# Altium PCB PCB.PcbDoc
Units mil, origin at the board's own origin, x right, y up, seen from the top; angles counter-clockwise.
Board outline 797.43 x 797.43 mil, 4 copper layers (Component Side, Power, Ground Plane, Solder Side), stack 42.047 mil thick; 42 components, 47 nets, 224 pads, 111 vias.
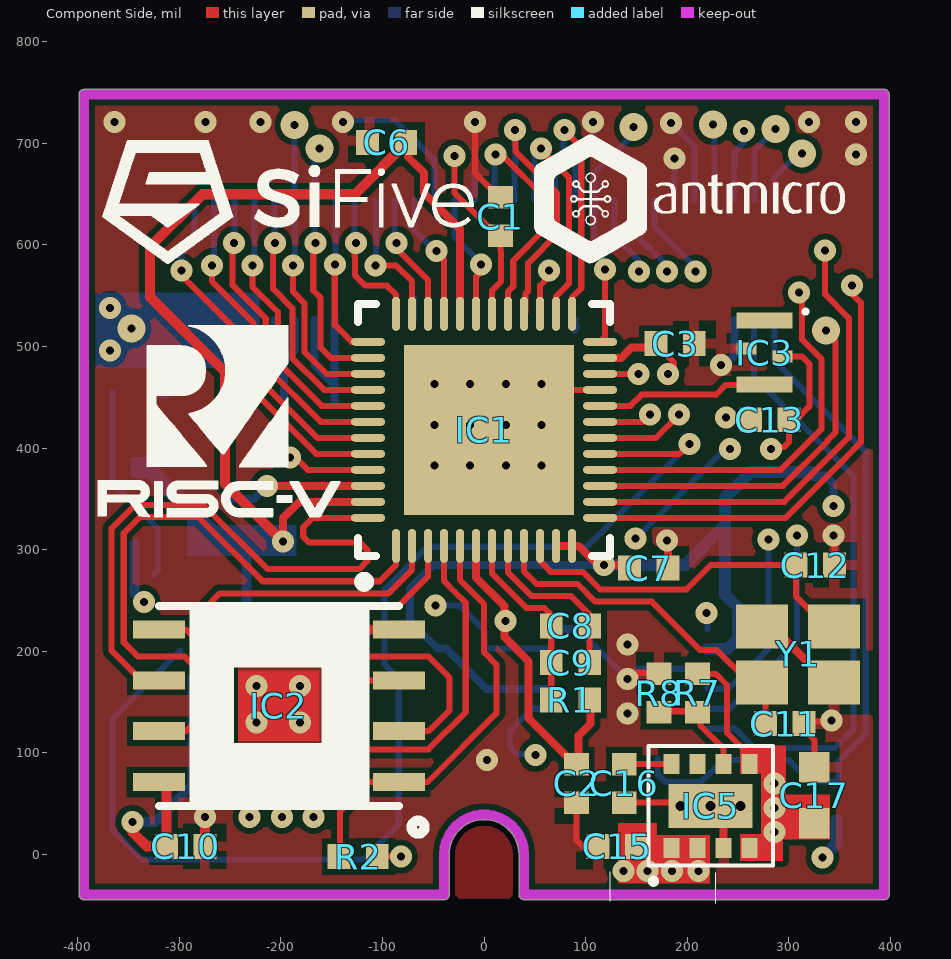
[diagram p0: Component Side view]
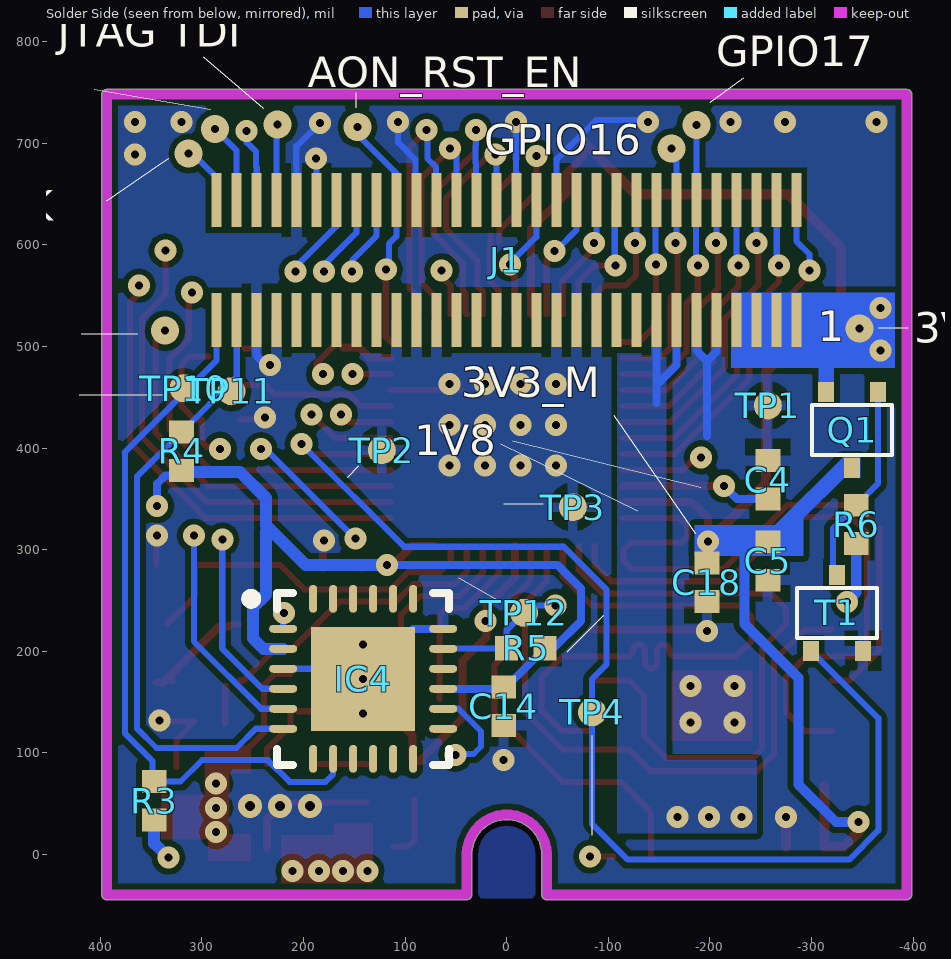
[diagram p1: Solder Side view, seen from below]
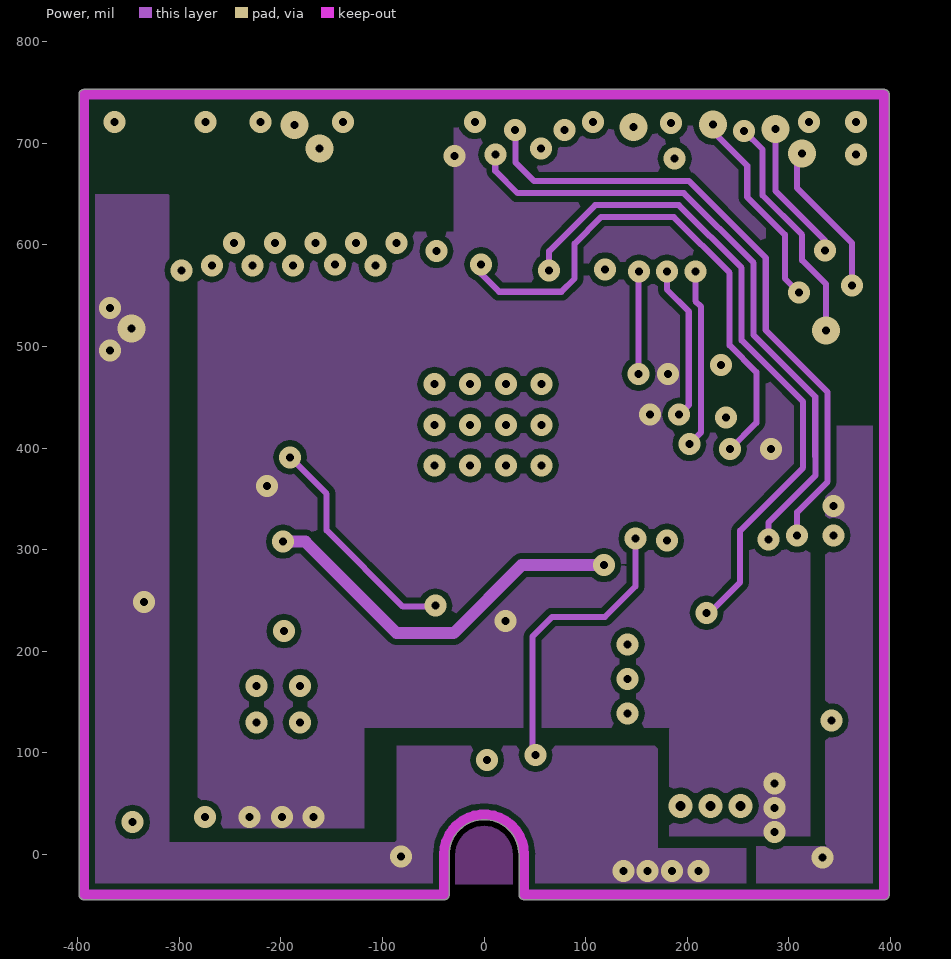
[diagram p2: Power]
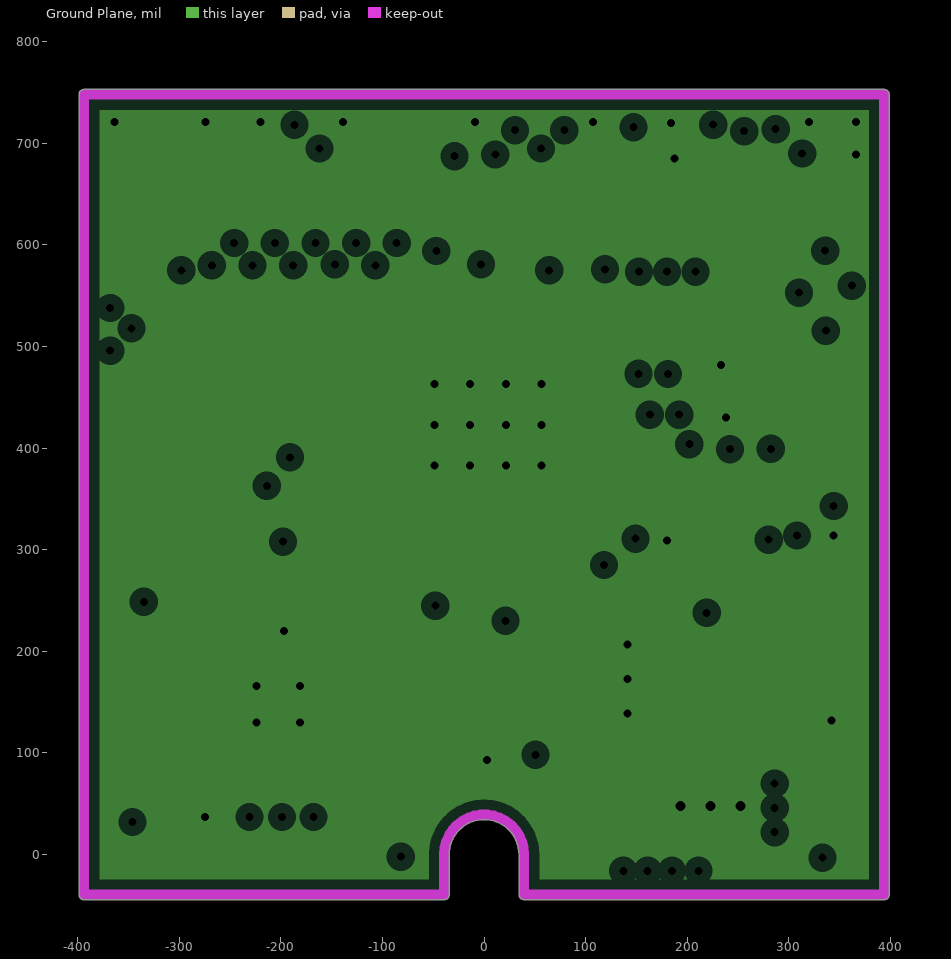
[diagram p3: Ground Plane, clearances drawn from the general rule]

## Layer stack, top to bottom
Top Solder: solder mask 0.4, Solder Resist, Dk 3.5
Component Side: signal copper 1.4173
Dielectric 1: core 11.811, FR-4, Dk 4.8
Power: signal copper 0.7087
Dielectric 4: core 14.1732, Dk 4.2
Ground Plane: plane copper 0.7087, net GND
Dielectric 3: core 11.811, Dk 4.2
Solder Side: signal copper 1.4173
Bottom Solder: solder mask 0.4, Solder Resist, Dk 3.5

## Board outline
-393.7,-44.39 cw(c-393.7,-39.37) -398.72,-39.37 -398.72,748.03 cw(c-393.7,748.03) -393.7,753.05 393.7,753.05 cw(c393.7,748.03) 398.72,748.03 398.72,-39.37 cw(c393.7,-39.37) 393.7,-44.39 40,-44.39 cw(c40,-39.37) 39.68,-44.38 39.69,-44.38 cw(c39.37,-39.37) 34.36,-39.37 34.36,0 ccw(c0,0) -34.36,0.07 cw(c-39.37,0) -34.35,0 -34.35,-39.37 cw(c-39.37,-39.37) -39.44,-44.39

## Design rules (kind name [scope] priority, off if disabled: settings)
Clearance [All] p1: gap=5.91
DiffPairsRouting [All] p1: maxlimit=8 minlimit=7.99 mostfreqgap=8 toplayer_maxgap=7.99 toplayer_prefgap=7.99 toplayer_minwidth=5.91 toplayer_maxwidth=11.81 toplayer_prefwidth=7.87 midlayer1_mingap=8 midlayer1_minwidth=5.91 midlayer1_maxwidth=11.81 midlayer1_prefwidth=7.87 bottomlayer_maxgap=7.99 bottomlayer_prefgap=7.99 bottomlayer_minwidth=5.91 bottomlayer_maxwidth=11.81 bottomlayer_prefwidth=7.87 maxuncoupledlength=500
HoleSize [All] p1: absolutevalues=TRUE maxlimit=150 minlimit=7.87 maxpercent=80.000 minpercent=20.000
MinimumAnnularRing [All] p1: minimumring=4.92
MinimumSolderMaskSliver [All] p1: minsoldermaskwidth=0
PlaneClearance [All] p1: clearance=10
PlaneConnect [All] p1: planeconnectstyle=Direct reliefexpansion=20 reliefentries=4 reliefconductorwidth=10 reliefairgap=10
PolygonConnect PolygonConnect_via [IsVia] p1: connectstyle=Direct reliefconductorwidth=10 reliefentries=4 polygonreliefangle="90 Angle" airgapwidth=10
PolygonConnect [All] p2: connectstyle=Relief reliefconductorwidth=10 reliefentries=4 polygonreliefangle="90 Angle" airgapwidth=10
RoutingVias [All] p1: holewidth=7.87 width=21.65 viastyle="Through Hole" minholewidth=7.87 minwidth=21.65 maxholewidth=7.87 maxwidth=27.56
SilkToSilkClearance [All] p1: silktosilkclearance=8
SilkToSolderMaskClearance [IsPad] p1: minsilkscreentomaskgap=3 clearancetoexposedcopper=TRUE
SolderMaskExpansion [All] p1: expansion=4
Width [All] p1: maxlimit=78.74 minlimit=5.91 preferedwidth=8
22 further rules are at their usual default settings.

## Components (designator, comment, footprint, x,y, rotation, side; value= is the part's Value field where it differs from the comment)
C1 "100n" 0402 16,628 r270 top
C2 "100n" 0402 91,70 r90 top
C3 "10u" 0402 188,503 r180 top
C4 "10u" 0402 -257,369 r270 bottom
C5 "100n" 0402 -257,289 r90 bottom
C6 "100n" 0402 -96,701 r0 top
C7 "100n" 0402 162,282 r180 top
C8 "100n" 0402 85,225 r180 top
C9 "100n" 0402 85,189 r180 top
C10 "100n" 0402 -293.7,8.03 r180 top
C11 "12p" 0402 296,129 r180 top
C12 "12p" 0402 326,285 r180 top
C13 "10u" 0402 281.3,428.03 r0 top
C14 "100n" 0402 3,146 r90 bottom
C15 "10u" 0402 131,8 r0 top
C16 "3n3" 0402 138,70 r90 top
C17 "22u" 0603 325,86 r270 top
C18 "10u" 0402 -197,268 r90 bottom
IC1 "FE310-G000" FE310-G000 0,418.03 r90 top
IC2 "IS25LP128" WSON_6x5mm_8pin -84,48 r90 top
IC3 "SIT1533AC-H5-D14-32.768D" SIT1533AC 276,494 r270 top
IC4 "SC18IS600" QFN-24_4X4MM 141.3,173.03 r180 bottom
IC5 "TPS82130SILT" MicroSIP 223,48 r90 top
J1 "AXK6F60347YG" AXK6F60347YG 0.3,585.03 r180 bottom locked
Q1 "NTS4173PT1G" SC70-3 -340,418 r270 bottom
R1 "100R" 0402 85,152 r180 top
R2 "100k" 0402 -124,-2 r180 top
R3 "1k" 0402 347,53 r90 bottom
R4 "1k" 0402 320,397 r90 bottom
R5 "1k" 0402 -18.7,203.03 r0 bottom
R6 "100k" 0402 -344,325 r90 bottom
R7 "124k" 0402 210,159 r270 top
R8 "100k" 0402 172,159 r90 top
T1 "DMN2004WK-7" SC70-3 -325,238 r90 bottom
TP1 "Testpad" TP-R-0.7 -257,442 r90 bottom
TP2 "Testpad" TP-R-0.7 123,398 r90 bottom
TP3 "Testpad" TP-R-0.7 -65,342 r90 bottom
TP4 "Testpad" TP-R-0.7 -84,140 r180 bottom
TP10 "Testpad" TP-R-0.7 318,459 r90 bottom
TP11 "Testpad" TP-R-0.7 271,456 r90 bottom
TP12 "Testpad" TP-R-0.7 -17,238 r90 bottom
Y1 "X22-16.000-12-30/30/-40+85" CRYSTAL_X22_2.5x2mm 309,197 r180 top

## Footprints (in the part's own frame and the unit in brackets; to place one, negate y for a bottom-side part, rotate by r counter-clockwise, add the part's x,y. Pads: shape width x height; smd on the part's side, far side on the other; paste and mask are expansions set on the pad)
0402 [mm]
  rect 0.57x0.62 smd: 1(-0.48,0) 2(0.48,0)
  body extent -0.55,-0.3 0.55,0.3, height 0.5
0603 [mil]
  rect 30x30 smd: 1(0,0) 2(55,0)
  body extent -2,-15 58,15, height 31
AXK6F60347YG [mm]
  rect 0.25x1.35 smd: 1(7.25,-1.501) 2(7.25,1.501) 3(6.75,-1.501) 4(6.75,1.501) 5(6.25,-1.501) 6(6.25,1.501) 7(5.75,-1.501) 8(5.75,1.501) 9(5.25,-1.501) 10(5.25,1.501) 11(4.75,-1.501) 12(4.75,1.501) 13(4.25,-1.501) 14(4.25,1.501) 15(3.75,-1.501) 16(3.75,1.501) 17(3.25,-1.501) 18(3.25,1.501) 19(2.75,-1.501) 20(2.75,1.501) 21(2.25,-1.501) 22(2.25,1.501) 23(1.75,-1.501) 24(1.75,1.501) 25(1.25,-1.501) 26(1.25,1.501) 27(0.75,-1.501) 28(0.75,1.501) 29(0.25,-1.501) 30(0.25,1.501) 31(-0.25,-1.501) 32(-0.25,1.501) 33(-0.75,-1.501) 34(-0.75,1.501) 35(-1.25,-1.501) 36(-1.25,1.501) 37(-1.75,-1.501) 38(-1.75,1.501) 39(-2.25,-1.501) 40(-2.25,1.501) 41(-2.75,-1.501) 42(-2.75,1.501) 43(-3.25,-1.501) 44(-3.25,1.501) 45(-3.75,-1.501) 46(-3.75,1.501) 47(-4.25,-1.501) 48(-4.25,1.501) 49(-4.75,-1.501) 50(-4.75,1.501) 51(-5.25,-1.501) 52(-5.25,1.501) 53(-5.75,-1.501) 54(-5.75,1.501) 55(-6.25,-1.501) 56(-6.25,1.501) 57(-6.75,-1.501) 58(-6.75,1.501) 59(-7.25,-1.501) 60(-7.25,1.501)
  body extent -8.99,-1.62 9.01,1.68, height 1.25
CRYSTAL_X22_2.5x2mm [mm]
  rect 1.3x1.1 smd: 1(0.9,0.7) 3(-0.9,-0.7) GND(-0.9,0.7) GND(0.9,-0.7)
  body extent -1.25,-1 1.25,1, height 0.8
FE310-G000 [mm]
  oval 0.85x0.2 smd paste+0 mask+0.05: 1(-2.9,2.2)
  oval 0.85x0.2 smd mask+0.05: 2(-2.9,1.8) 3(-2.9,1.4) 4(-2.9,1) 5(-2.9,0.6) 7(-2.9,-0.2) 8(-2.9,-0.6) 9(-2.9,-1) 10(-2.9,-1.4) 12(-2.9,-2.2) 25(2.9,-2.2) 26(2.9,-1.8) 27(2.9,-1.4) 28(2.9,-1) 29(2.9,-0.6) 31(2.9,0.2) 33(2.9,1) 34(2.9,1.4) 35(2.9,1.8) 36(2.9,2.2) IVDD(-2.9,-1.8) IVDD(2.9,0.6) VDD(-2.9,0.2) VDD(2.9,-0.2)
  oval 0.2x0.85 smd mask+0.05: 13(-2.2,-2.9) 14(-1.8,-2.9) 15(-1.4,-2.9) 16(-1,-2.9) 17(-0.6,-2.9) 18(-0.2,-2.9) 19(0.2,-2.9) 20(0.6,-2.9) 21(1,-2.9) 22(1.4,-2.9) 23(1.8,-2.9) 24(2.2,-2.9) 37(2.2,2.9) 38(1.8,2.9) 39(1.4,2.9) 40(1,2.9) 41(0.6,2.9) 42(0.2,2.9) 43(-0.2,2.9) 44(-0.6,2.9) 45(-1,2.9) 48(-2.2,2.9) IVDD(-1.8,2.9) VDD(-1.4,2.9)
  rect 4.25x4.25 smd mask+0.05: 49(0,-0.127)
  silkscreen extent -3.92,-3.15 3.15,3.15, body extent -3.01,-3.03 3.03,3.01, height 0.85
MicroSIP [mm]
  rect 0.5x0.4 smd: 1(-1.05,0.975) 2(-1.05,0.325) 3(-1.05,-0.325) 4(-1.05,-0.975) 5(1.05,-0.975) 6(1.05,-0.325) 7(1.05,0.325) 8(1.05,0.975)
  rect 1.1x2.1 smd: 9(0,0)
  silkscreen extent -1.95,-1.56 1.5,1.56, body extent -1.4,-1.5 1.4,1.5, height 1.54
QFN-24_4X4MM [mm]
  oval 0.7x0.2 smd: 1(-2,1.25) 2(-2,0.75) 3(-2,0.25) 4(-2,-0.25) 5(-2,-0.75) 6(-2,-1.25) 13(2,-1.25) 14(2,-0.75) 15(2,-0.25) 16(2,0.25) 17(2,0.75) 18(2,1.25)
  oval 0.2x0.7 smd: 7(-1.25,-2) 8(-0.75,-2) 9(-0.25,-2) 10(0.25,-2) 11(0.75,-2) 12(1.25,-2) 19(1.25,2) 20(0.75,2) 21(0.25,2) 22(-0.25,2) 23(-0.75,2) 24(-1.25,2)
  rect 2.6x2.6 smd: 25(0,0)
  silkscreen extent -2.93,-2.15 2.15,2.15, body extent -2,-2 2,2, height 0.9
SC70-3 [mm] "SC70, 3-Leads, Pitch 0,65mm, EIAJ SC-88a"
  rect 0.5x0.4 smd: 1(-0.95,0.65) 2(-0.95,-0.65) 3(0.95,0)
  silkscreen extent -0.63,-1 0.63,1, body extent -1.15,-1.08 1.15,1.02, height 1
SIT1533AC [mm]
  rect 0.4x1.4 smd: 1(-0.8,0) 3(0.8,0)
  rect 0.3x0.5 smd: 2(-0.1,-0.45) 4(0.1,0.45)
  silkscreen extent -1.07,0.98 -0.98,1.07, body extent -1,-0.6 1,0.6, height 0.55
TP-R-0.7 [mm]
  round 0.7 smd: 1(0,0)
WSON_6x5mm_8pin [mm] "WSON 6x5mm 8 pins"
  rect 0.45x1.3 smd: 1(0.595,0) 2(1.865,0) 3(3.135,0) 4(4.405,0) 5(4.405,6) 6(3.135,6) 7(1.865,6) 8(0.595,6)
  silkscreen extent 0,0 5,6, body extent -0.04,0.03 4.96,6.03, height 0.78

## Part data
C1 C2 C5 C6 C7 C8 C9 C10 C14: library part C_100n_0402, "MLCC SMT Capacitor 100nF 0402"
C3 C4 C13 C15 C18: library part C_10u_0402, "MLCC SMT Capacitor 10uF 0402"
C11 C12: library part C_12p_0402, "MLCC SMT Capacitor 12pF 0402"
C16: library part C_3n3_0402, "MLCC SMT Capacitor 3.3nF 0402"
C17: library part C_22_0603, "MLCC SMT Capacitor 22uF 0603"
IC2: "Flash Memory 128Mb QPI/QSPI, WSON, RoHS, ET"
IC3: library part SIT1533AC, "32.768kHz LVCMOS MEMS (Silicon) Oscillator Surface Mount 1.2 V ~ 3.63 V 1.3µA"
IC4: "IC SPI TO I2C BUS 24-HVQFN"
IC5: library part TPS82130, "3-A 17V STEP-DOWN CONVERTER"
J1: "CONN HEADER BRD/BRD .5MM 60POS"
Q1: library part PMOS, "MOSFET P-CH 30V 1.2A SC70-3"
R1: library part R_100R_0402, "SMT Resistor 100R 0402"
R2 R6 R8: library part R_100k_0402, "SMT Resistor 100k 0402"
R3 R4 R5: library part R_1k_0402, "SMT Resistor 0402"
R7: library part R_124k_0402, "SMT Resistor 124k 0402"
T1: library part NMOS, "MOSFET N-CH 20V 540MA SC70-3"
TP1 TP2 TP3 TP4 TP10 TP11 TP12: "Testpad 1.5mm diameter"
Y1: library part CRYSTAL_4PIN, "MERCURY UNITED ELECTRONICS  X22-16.000-12-30/30/-40+85  Crystal, 16 MHz, SMD, 2.5mm x 2mm, 30 ppm, 12 pF, 30 ppm, X22 Series"

## Via types
v1: diameter 21.65, hole 7.87, Component Side to Solder Side, tented both sides, 94 vias
v2: diameter 27.56, hole 7.87, Component Side to Solder Side, tented top, 8 vias
v3: diameter 21.65, hole 7.87, Component Side to Solder Side, tented bottom, 4 vias
v4: diameter 23.62, hole 9.84, Component Side to Solder Side, tented bottom, 3 vias
v5: diameter 21.65, hole 7.87, Component Side to Solder Side, tented top, 2 vias

## Nets (pads, with @x,y where several pads share a name; then routed paths per layer and width w, separated by ;. In a path a pad name is that pad's centre, name@x,y a point inside that pad or via, vN(x,y) a via of type N, cw(c..) or ccw(c..) an arc to the next point about the centre after c; other vN are vias at no path point)
1V8: C1.2 C2.2 C3.2 C4.2 C13.2 C17.2 IC1.19 IC1.23 IC1.VDD IC3.4 IC5.4 IC5.5 J1.13 J1.15 R1.1 R7.1 | length 1216.2
  Component Side w5.94: R7.1@213,177.9 228.1,177.9 239.1,166.9 239.1,119.9 261.39,97.61 IC5.5
  Component Side w5.98: v1(-29.19,687.43) -29.19,651.19 4.9,617.1 7,617.1 C1.2@7,603 ; IC1.VDD@7.87,532.2 7.87,555.32 16.78,564.22 16.78,593.22 16,594 C1.2 ; IC1.19 156,425.91 v1(163.13,433.03) ; C3.2 169.1,501.9 187,484 187,473 v1(181,473) ; v1(282.22,399.37) 282.22,401.22 295.22,401.22 300.2,406.2 C13.2 307.03,428.03 320.09,441.09 320.09,483 313.03,490.06 IC3.4
  Component Side w7.87: v5(-213.91,362.91) IC1.VDD@-114.17,362.91 ; IC1.VDD@-7.87,303.86 -7.87,272.54 20,244.67 v1@20,225 ; v1@23,228 v1@20,225 ; C2.2@83.36,91.9 C2.2@86.1,91.9 ; R1.1@104.9,152 104.9,128.9 93,117 93,93.9 91,91.9 C2.2@86.1,91.9 ; IC1.23 134.9,488.9 145.13,499.13 C3.2@161.3,499.13 ; v1@20,225 20,214 43.74,190.26 43.74,134.26 65.1,112.9 C2.2@86.1,91.9
  Power w5.98: v1@282.22,399.22 v1(282.22,399.37)
  Solder Side w7.87: C4.2 -226.72,350.1 v5(-213.91,362.91) ; J1.13 -167.02,481.68 -147.34,462 ; -147.34,444.66 -147.34,462 ; J1.15 -147.34,462
  other v1: 286,22 -231,37 -199,37 -168,37 286,46 286,70 21,230
3V3: C15.2 IC5.1 IC5.2 J1.1 J1.3 J1.5 J1.7 Q1.2 R2.1 R6.1 | length 115.9
  Component Side w5.98: R2.1 v1(-82,-2)
  Component Side w10: v1(-334.98,248.83) -334,249.81 v1@-334,252
  Solder Side w10: R6.1 -344,257.84 v1(-334.98,248.83)
  Solder Side w14.96: Q1.2 -314.41,483.59
  other v1: 137,-16 161,-16 185,-16 211,-16 -368,496 -368,538
  other v2: -347,518
3V3_M: C5.2 C6.2 C7.2 C10.2 C14.2 C18.2 IC1.12 IC1.IVDD IC2.8 IC4.2 IC4.15 Q1.3 R3.1 R4.1 R5.1 | length 2778.5
  Component Side w7.87: v5(-198,308) -198,331.17 -182,347.17 IC1.IVDD@-114.17,347.17 ; C6.2@-75.1,701.95 -75.1,686.86 -59,670.76 -59,651 -23.67,615.67 -23.67,532.25 IC1.IVDD@-23.62,532.2 ; IC1.IVDD@70.87,303.86 IC1.12 93.14,303.86 v1@115,282 ; v1(118,285) 140.1,285 C7.2
  Component Side w10: v1(-346,32) -346,22.03 -332,8.03 C10.2 IC2.8@-312.6,67.88 ; v5(-198,308) -255,365 -255,475 -329,549 -329,598 -277,650 -127.05,650 -75.1,701.95 C6.2@-75.1,703
  Component Side w11.81: v1(344,343) v1@347.29,343
  Power w11.81: v5(-198,308) -176,308 -86,218 -30,218 37,285 v1(118,285)
  Solder Side w7.87: IC4.15 2.24,163.19 R5.1 -46.03,203.03 -73,230 -73,262 -50,285 v1(118,285) ; 237,318 237,324 ; 262.73,376.73 264.1,378.1 291.6,378.1 ; R4.1@325,373.1 335.9,373.1 344,365 v1(344,343)
  Solder Side w10: v1(-346,32) -324,32 -287,69 -287,174 -233.89,227.11 -233.89,302.89 -236,305
  Solder Side w11.81: v1(118,285) 198,285 237,324 237,351 262.73,376.73 321.37,376.73 R4.1@325,373.1 ; IC4.2 239.56,202.56 250,213 250,243 237,256 237,318 ; v1(333,-3) 347,11 R3.1
AON_ERST_EN: IC1.24 J1.42 | length 233.6
  Component Side w6.3: IC1.24 119,509.47 v1(119,576)
  Solder Side w5.98: v1(119,576) 116,579 116,601 108.57,608.43 J1.42 108.57,670.5 147,708.93 v2(147,716)
AON_PMU_DWAKEUP_N: IC1.18 J1.46 | length 322.4
  Component Side w5.98: IC1.18 169.16,410.16 v1(192,433)
  Power w5.98: v1@180,578 v1(180,573.65) 180,556 201.39,534.61 201.39,442.39 v1(192,433)
  Solder Side w5.98: J1.46 147.94,612.06 v1@180,580
CLK: IC1.20 IC3.3 | length 177.8
  Component Side w5.98: IC1.20 143.85,441.65 154.96,452.76 228.22,452.76 228.22,452.5 238,462.28 277.04,462.28 IC3.3@281.3,466.54
GND: C1.1 C2.1 C3.1 C4.1 C5.1 C6.1 C7.1 C10.1 C11.1 C12.1 C13.1 C14.1 C15.1 C16.1 C17.1 C18.1 IC1.21 IC1.49 IC2.4 IC3.2 IC4.3 IC4.18 IC4.25 IC5.3 IC5.9 J1.9 J1.11 J1.21 J1.23 J1.25 J1.26 J1.30 J1.37 J1.39 J1.40 J1.41 J1.50 J1.52 J1.53 J1.55 R8.2 T1.2 TP1.1 TP2.1 TP3.1 Y1.GND | length 1702.6
  Component Side w5.98: v1@-9,713 -9,670.9 C1.1@7,654.9 ; IC1.49@44.37,457.4 IC1.21 ; C2.1@91,54.1 91,14 97,8 C15.1 ; C16.1 IC5.9@219.9,51.1 ; v1(141.3,173.03) 147.17,178.9 R8.2@172,178.9 ; v1(238,430) 239.97,428.03 C13.1 ; IC3.2@248.94,497.94 IC3.2 ; Y1.GND@263.57,226.56 Y1.GND@273.49,226.56 ; C17.1 325,113.23 307.32,130.91 340.91,130.91 v1(342,132) ; Y1.GND@328.61,171.44 Y1.GND@334.43,171.44 ; v1@344,306 v1(344,314.28) 344,305 344.9,304.1 C12.1
  Component Side w7.87: v1@180,306 180.9,305.1 C7.1 ; v1@227.9,482 v1(233,482)
  Component Side w8: v1@-195.57,221.43 IC2.4 ; v4(223,48) 235.8,35.2 IC5.3 ; Y1.GND@273.57,224.56 283.18,224.56 338.3,169.44 Y1.GND@344.43,169.44
  Component Side w10: C10.1 v1(-274.8,36.93)
  Power w7.87: v1@180,306 v1@180,307
  Solder Side w5.98: v1@-133,723 -87.89,723 -49.89,685 -49,685 -48.91,684.91 J1.26 ; J1.23@-68.9,525.94 J1.23@-68.9,548.23 ; -9.54,671.54 J1.30 -9,644.67 v1@-9,713 ; J1.39@88.58,515.91 88.88,516.2 J1.39@91.46,518.78 ; J1.40 89.89,645.13 89.89,683.89 107,701 v1(107,721) ; IC4.25@99.67,214.67 v1(141.3,173.03) 151.14,182.87 IC4.3 ; v1(184,720) 206.82,697.18 ; J1.50 v1@187.31,686.32 ; J1.52@206.82,643.96 206.82,697.18 ; 207.16,676.2 207.16,696.84 206.82,697.18
  Solder Side w7.87: IC4.18 92.09,222.24 IC4.25@99.67,214.67 ; J1.39@88.88,516.2 J1.39 ; v1(233,482) 237,482 246.36,491.36 J1.55
  Solder Side w8: J1.9 -206.39,495.19 -197.1,485.9 ; -197.1,411.9 -197.1,485.9 ; J1.11 -186.71,496.29 -197.1,485.9
  other v1: 3,93 141.3,138.97 141.3,207 -197,220 180,309 -48.7,383.03 -13.7,383.03 21.3,383.03 56.3,383.03 -48.7,423.03 -13.7,423.03 21.3,423.03 56.3,423.03 -48.7,463.03 -13.7,463.03 21.3,463.03 56.3,463.03 187.63,685 366,689 -364,721 -274,721 -220,721 -139,721 -9,721 320,721 366,721
  other v3: -224,130 -181,130 -224,166 -181,166
  other v4: 193.47,48 252.53,48
GPIO0: IC1.25 J1.38 | length 263.4
  Component Side w5.98: v1(79,713) 95.63,696.37 95.63,557.37 86.61,548.35 IC1.25
  Solder Side w5.98: J1.38 69.55,644.48 69.55,676.55 78,685 78,711 v1@79,712
GPIO1: IC1.26 J1.36 | length 234.6
  Component Side w5.98: v1(56,695) 55,695 83.72,666.28 83.72,562.27 70.87,549.41 IC1.26
  Solder Side w5.98: J1.36 49.51,688.51 v1(56,695)
GPIO2: IC1.27 IC4.1 | length 715
  Component Side w5.98: IC1.27 55.12,560.12 v1@64,569
  Power w5.98: v1(64,575) 64,594 109.22,639.22 191.59,639.22 253.44,577.37 253.44,506.26 314.02,445.69 314.02,380.83 252,318.81 252,268 222,238 v1(219,238)
  Solder Side w5.98: v1(219,238) 220.04,236.96 IC4.1
GPIO3: IC1.28 IC4.5 J1.34 | length 1124.3
  Component Side w5.98: v1@30.37,709 30.72,708.65 30.72,692.28 71.83,651.17 71.83,610.83 43.23,582.23 43.23,554.67 40.56,552 40.56,533.39 IC1.28
  Power w5.98: v1@30.37,709 30.72,708.65 30.72,681.28 49,663 201.44,663 277.22,587.22 277.22,516.11 337.91,455.43 337.91,388 ; v1(308,314) 308,337.11 338.02,367.13 338.02,395.64
  Solder Side w5.98: J1.34@30.02,644.31 J1.34@30.02,644.67 ; J1.34@30.37,644.67 30.1,644.94 30.1,680.21 30.72,680.83 30.72,697.17 30.1,697.79 30.1,708.73 v1@30.37,709 ; IC4.5 241.77,143.5 308,209.73 v1(308,314)
  other v1: 30.37,713
GPIO4: IC1.29 IC4.4 J1.32 | length 1061.8
  Component Side w5.98: v1@10.24,689 v1(11,689) 17.19,689 59.94,646.24 59.94,615.76 28.67,584.48 28.67,559.3 23.62,554.25 IC1.29
  Power w5.98: v1(11,689) 11,673 32.89,651.11 196.52,651.11 265.33,582.29 265.33,511.19 325.91,450.62 325.91,392 ; v1(280,310) 280,327 326.02,373.02 326.02,404.64
  Solder Side w5.98: J1.32 v1@10.14,688.77 ; IC4.4 240.55,163.19 280,202.64 v1(280,310)
GPIO5: IC1.31 IC4.14 J1.28 | length 1154.2
  Component Side w5.98: IC1.31 -7.87,568.86 v1@-2.91,573.82
  Power w5.98: v1(-3,581) -2.91,580.94 -2.91,571.68 14.77,554 76,554 89,567 89,601.33 115,627.33 186.67,627.33 241.56,572.44 241.56,501.34 268,474.89 268,425 v1(242,399) ; v1(50.63,98.14) 47.72,101.04 47.72,214.72 67,234 119,234 149,264 v1(149,311)
  Solder Side w5.98: J1.28 -29.23,608.12 -3,581.89 v1(-3,581) ; v1(50.63,98.14) 49.77,99 32.71,99 25.33,106.38 25.33,121.33 47.5,143.5 IC4.14 ; v1@149,312 v1(149,311) 237,399 v1(242,399)
GPIO9: IC1.33 J1.24 | length 123.6
  Component Side w5.98: v1(-47,594) -39.37,586.37 IC1.33
  Solder Side w5.98: J1.24 -68.6,614.6 v1@-48,594
GPIO10: IC1.34 J1.22 | length 129.7
  Component Side w5.98: v1(-86,602) -88,602 -88,598.04 -55.12,565.16 IC1.34
  Solder Side w5.98: J1.22 -88.28,602.28 -88,602 v1(-86,602)
GPIO11: IC1.35 J1.20 | length 142.6
  Component Side w5.98: v1(-107,580) -86.77,580 -70.87,564.1 IC1.35
  Solder Side w5.98: J1.20 -106.28,642.43 -106.28,582.72 -109,580 v1(-107,580)
GPIO12: IC1.36 J1.18 | length 142.4
  Component Side w5.98: v1(-126,602) -127.37,602 -127.37,589.26 -127.28,589.17 -127.28,570.38 -116.89,560 -95.61,560 -86.61,551 IC1.36
  Solder Side w5.98: v1@-127.65,602.28 J1.18
GPIO13: IC1.37 J1.16 | length 163.9
  Component Side w5.98: v1(-147,581) -147,521.33 -130.32,504.65 IC1.37
  Solder Side w5.98: J1.16 -146.28,643.06 -146.28,582.17 -147.45,581 v1(-147,581)
GPIO16: IC1.38 J1.14 | length 252.7
  Component Side w5.98: v1(-166,602) -168.17,599.83 -168.17,555.17 -161,548 -161,499 -150.9,488.9 IC1.38
  Solder Side w5.98: v1@-167.02,602.28 J1.14 -167.02,689.98 v2(-162,695)
GPIO17: IC1.39 J1.12 | length 300.7
  Component Side w5.98: v1(-188,580) -188,554 -176.81,542.81 -176.81,494.81 -155.15,473.15 IC1.39
  Solder Side w5.98: v1(-188,580) -187.82,580 -186.28,581.54 -186.28,643.69 J1.12 v2(-186.71,718.29)
GPIO18: IC1.40 J1.10 | length 251.3
  Component Side w5.98: v1(-206,602) -206.11,602 -207.72,600.39 -207.72,556.91 -188.7,537.89 -188.7,488.7 -157.4,457.4 IC1.40
  Solder Side w5.98: v1@-206.39,602.28 J1.10
GPIO19: IC1.41 J1.8 | length 277.2
  Component Side w5.98: v1(-228,580) -228,559 -203.03,534.03 -203.03,484.85 -159.84,441.65 IC1.41
  Solder Side w5.98: v1(-228,580) -226.08,581.92 J1.8
GPIO20: IC1.42 J1.6 | length 301.3
  Component Side w5.98: v1(-246,602) -247.72,600.28 -247.72,560.68 -214.92,527.88 -214.92,479.92 -160.91,425.91 IC1.42
  Solder Side w5.98: v1@-245.76,602.28 J1.6
GPIO21: IC1.43 J1.4 | length 324.2
  Component Side w5.98: v1(-268,580) -268,564.15 -226.81,522.96 -226.81,472.81 -164.16,410.16 IC1.43
  Solder Side w5.98: v1@-265.45,583.03 -265.72,583.31 -265.72,643.85 J1.4
GPIO22: IC1.44 J1.2 | length 354.8
  Component Side w5.98: v1@-297,569 -238.7,510.7 -238.7,467.7 -165.41,394.41 IC1.44
  Solder Side w5.98: v1(-298,575) -298,591 -285.13,603.87 J1.2
GPIO23: IC1.45 IC4.17 R5.2 TP12.1 | length 447.3
  Component Side w5.98: v1(-191,391) -186,391 -173.66,378.66 IC1.45
  Power w5.98: v1(-191,391) -155,355 -155,319 -80,244 -49,244 v1(-48,245) ; v1@-43.07,242 v1@-42.09,241.02
  Solder Side w5.98: v1(-48,245) -24,245 TP12.1 0.2,220.8 R5.2 62.09,203.03 IC4.17
JTAG_TCK: IC1.13 J1.60 | length 663.5
  Component Side w5.98: IC1.13 296.8,331.42 356,390.62 356,390.81 370.89,405.7 370.89,543.11 362,552 v1(362,560)
  Power w5.98: v2@317,690 v2(313,690) 308,685 308,656 362,602 v1(362,560)
  Solder Side w5.98: J1.60 285.73,666.73 309,690 v2(313,690)
JTAG_TDI: IC1.16 J1.54 | length 649.1
  Component Side w5.98: IC1.16 292.04,378.66 331.98,418.61 331.98,487.92 313.02,506.89 v1@313.02,550.38
  Power w5.98: v2(225.49,718.39) 225.49,711.51 259,678 259,647.08 296,610.08 296,567 v1(309.95,553.05)
  Solder Side w5.98: v2(225.49,718.39) 226.68,717.2 J1.54
JTAG_TDO: IC1.14 J1.58 | length 682.9
  Component Side w5.98: IC1.14 295.54,347.17 359,410.62 359,528 335.68,551.32 v1(335.68,594.39)
  Power w5.98: v2(287,714) 287,653 335.68,604.32 v1(335.68,594.39)
  Solder Side w5.98: J1.58 266.05,693.05 v2(287,714)
JTAG_TMS: IC1.15 J1.56 | length 665.9
  Component Side w5.98: IC1.15 294.1,362.91 338,406.81 338,407.81 345.89,415.7 345.89,506.09 v2(336.32,515.66) ; v1(256,712) 259,712 v1@261,714
  Power w5.98: v1(256,712) 274,694 274,648.89 313,609.89 313,585 336.32,561.68 v2(336.32,515.66) v2@334.66,515.66
  Solder Side w5.98: J1.56@246.4,646.24 246.06,645.91 246.06,676.17 246.72,676.83 246.72,691.72 256,701 v1(256,712)
NetC8_1: C8.1 C9.1 IC1.8 | length 169.9
  Component Side w5.98: IC1.8 23.62,277.52 46.7,254.45 85.55,254.45 103.9,236.1 C8.1 C9.1@103.9,190
NetC8_2: C8.2 C9.2 IC1.7 R1.2 | length 185.3
  Component Side w5.98: IC1.7 7.87,276.46 41.77,242.56 59.44,242.56 66.1,235.9 C8.2 R1.2@66.1,153
NetC16_2: C16.2 IC5.8 | length 46.8
  Component Side w5.98: C16.2 138.44,89.34 IC5.8
NetIC5_6: IC5.6 R7.2 R8.1 | length 93.2
  Component Side w5.98: R8.1@172,141.1 R7.2@205,141.1 ; R7.2@213,140.1 213,127 235.8,104.2 IC5.6
NetQ1_1: Q1.1 R6.2 T1.3 | length 200.1
  Solder Side w5.98: Q1.1 -365.59,365.49 R6.2 -321,320.9 -321,279.4 T1.3
OSC1: C11.2 IC1.9 Y1.1 | length 330.8
  Component Side w5.98: IC1.9 39.37,278.59 51.62,266.34 91.95,266.34 109.28,249.01 164.99,249.01 212.78,201.22 229.08,201.22 258.86,171.44 Y1.1@263.57,171.44 ; C11.2 Y1.1@277.1,165.91
OSC2: C12.2 IC1.10 Y1.3 | length 358.4
  Component Side w5.98: IC1.10 55.12,288.66 65.55,278.23 96.88,278.23 114.21,260.9 199,260.9 206.09,267.99 223.11,285 C12.2 307.1,253.89 Y1.3@334.43,226.56
PMU_OUT0: IC1.22 J1.44 | length 207
  Component Side w5.98: IC1.22 v1(152,473.15)
  Power w5.98: v1(152,473.15) v1@152,573.21
  Solder Side w5.98: J1.44 128.25,608.64 152,584.89
  other v1: 152.44,573.65
PMU_OUT1: IC1.17 J1.48 T1.1 TP4.1 | length 1459.6
  Component Side w5.98: IC1.17 192.41,394.41 v1(202,404)
  Power w5.98: v1(202,404) 213.28,415.28 213.28,539.54 208,544.81 v1(208,573.65)
  Solder Side w5.98: T1.1 -365.72,134.28 -365.72,23.83 -336.89,-5 -119,-5 -84,30 TP4.1 -84,173 -98,187 -98,261 -56,303 101,303 v1(202,404) ; J1.48 167.62,618.38 v1@208,578
QSPI_CS: IC1.5 IC2.1 R2.2 | length 418.2
  Component Side w5.98: R2.2 -141.9,-1 -141.9,42.1 -112.57,71.43 IC2.1 -55.57,71.43 12,139 12,186.92 -0.08,199 -0.08,246.6 -23.62,270.14 IC1.5
QSPI_DQ0: IC1.4 IC2.5 | length 611.1
  Component Side w5.98: IC2.5 -293.43,221.43 -263.11,191.11 -263.11,99.3 -245.81,82 -141.6,82 -120.1,103.5 -54.89,103.5 -18.11,140.28 -18.11,247.81 -29.15,258.85 -39.37,269.07 IC1.4 IC1.4@-38.7,303.19
QSPI_DQ1: IC1.3 IC2.2 | length 619.3
  Component Side w5.98: IC2.2 -54.57,121.43 -34,142 -34,174 -55,195 -64,195 -118.28,195 cw(c-118.28,200.83) -124.11,200.83 ccw(c-130.09,200.83) -130.09,206.81 ccw(c-130.09,200.83) -136.08,200.83 -136.08,195 -136.08,189.17 cw(c-142.06,189.17) -142.06,183.19 cw(c-142.06,189.17) -148.05,189.17 -148.05,195 -148.05,200.83 ccw(c-154.03,200.83) -154.03,206.81 ccw(c-154.03,200.83) -160.02,200.83 cw(c-165.84,200.83) -165.84,195 -166,195 -226,195 -241.09,210.09 -241.09,233.91 -229.89,245.11 -83.89,245.11 -55.12,273.88 IC1.3
QSPI_DQ2: IC1.2 IC2.3 | length 617.4
  Component Side w5.98: IC2.3 -120.57,171.43 -135.1,156.9 -135.1,116.9 -157,95 -242,95 -251.22,104.22 -251.22,203.22 -275,227 -275,242 -260,257 -94,257 -70.87,280.13 IC1.2
QSPI_DQ3: IC1.1 IC2.7 | length 615.4
  Component Side w5.98: IC2.7 -293.57,121.43 -275,140 -275,175 -295,195 -340.83,195 -354.71,208.88 -354.71,316.48 -339.08,332.11 -281.11,332.11 -218,269 -102.73,269 -86.61,285.12 IC1.1
QSPI_SCK: IC1.48 IC2.6 | length 625.8
  Component Side w5.98: IC2.6 -337.43,171.43 -366.6,200.6 -366.6,321.4 -344,344 -276.19,344 -213.08,280.89 -123.11,280.89 -115,289 -115,300 -122,307 -172,307 -178,313 -178,322 -168.58,331.42 IC1.48
SCL: IC4.8 J1.59 R3.2 TP10.1 | length 714.9
  Solder Side w5.98: IC4.8 170.83,79.17 178.39,71.61 213.72,71.61 235.14,93.03 299.97,93.03 321.1,71.9 R3.2 348.63,73.53 348.63,92 375.61,118.98 375.61,395.27 ; J1.59 285.73,486.17 376.13,395.78
SDA: IC4.6 J1.57 R4.2 TP11.1 | length 592
  Solder Side w5.98: IC4.6 247.09,123.82 265.98,104.92 344.74,104.92 363.72,123.91 363.72,372.17 R4.2 265.75,470.15 J1.57@265.75,515.91
pads on no net: IC3.1 IC4.7 IC4.9 IC4.10 IC4.11 IC4.12 IC4.13 IC4.16 IC4.19 IC4.20 IC4.21 IC4.22 IC4.23 IC4.24 IC5.7 J1.17 J1.19 J1.27 J1.29 J1.31 J1.33 J1.35 J1.43 J1.45 J1.47 J1.49 J1.51

## Polygon pours and split planes (outlines as drawn)
GND on Solder Side "Solder Side-No Net" (solid, pour order 21): 125,552 -96,552 -96,348 125,348
1V8 on Solder Side "Solder Side-No Net" (solid, pour order 17): -157,547 -156,546 -109,546 -109,22 -108,21 -246,21 -246,93 -245,94 -246,93 -157,93
GND on Solder Side "Solder Side-No Net" (solid, pour order 27): 397.54,751.87 -397.54,751.87 -397.54,-43.21 397.54,-43.21
no net on Top Overlay "AntmicroLogo" (solid, pour order 2): 168.08,635.74 167.3,639.7 167.62,642.24 168.57,644.38 170.09,646.16 172.11,647.61 174.59,648.77 177.48,649.66 180.71,650.31 184.25,650.76 184.25,652.61 184.14,654.06 183.83,655.3 183.31,656.34 182.6,657.17 181.68,657.81 180.58,658.26 179.28,658.53 177.79,658.62 173.79,658.08 170.21,656.71 169.04,659.74 173.36,661.32 178.24,661.93 182.67,661.34 186.01,659.54 188.12,656.48 188.85,652.11 188.85,632.69 184.44,631.14 178.8,630.55 173.95,631.14 170.33,632.88
no net on Top Overlay "AntmicroLogo" (solid, pour order 14): 317.44,631.12 317.44,659.8 321.95,661.35 327.77,661.93 329.41,661.87 330.41,661.76 329.29,658.06 327.83,658.44 326.2,658.56 324.19,658.38 322.38,657.78 322.38,631.12
no net on Top Overlay "AntmicroLogo" (solid, pour order 16): 332.74,637.3 334.02,635 335.68,633.13 337.74,631.73 340.2,630.86 343.07,630.55 345.94,630.86 348.39,631.73 350.45,633.13 352.12,635 353.4,637.3 354.31,639.98 354.85,642.99 355.03,646.27 354.85,649.54 354.31,652.53 353.4,655.19 352.12,657.49 350.45,659.36 348.4,660.75 345.94,661.62 343.07,661.93 340.2,661.62 337.74,660.75 335.68,659.36 334.02,657.49 332.74,655.19 331.83,652.53 331.29,649.54 331.12,646.27 331.29,642.99 331.83,639.98
no net on Top Overlay "AntmicroLogo" (solid, pour order 12): 295.94,637.23 294.96,639.91 294.36,642.94 294.16,646.27 294.36,649.6 294.97,652.62 295.96,655.29 297.31,657.57 298.99,659.41 301,660.78 303.31,661.63 305.89,661.93 309.73,661.41 312.68,659.97 311.5,657.04 310.51,657.66 309.35,658.14 308.07,658.45 306.73,658.56 303.52,657.64 301.16,655.08 299.71,651.22 299.21,646.38 299.71,641.58 301.18,637.7 303.54,635.09 306.73,634.15 308.06,634.25 309.32,634.54 310.46,635 311.44,635.6 312.68,632.52 309.73,631.07 305.89,630.55 303.29,630.85 300.98,631.71 298.97,633.09 297.29,634.94
no net on Top Overlay "AntmicroLogo" (solid, pour order 6): 226.28,632.78 224.81,635.17 224.29,638.47 224.29,658.28 220.81,658.28 220.81,661.37 224.29,661.37 224.29,668.32 229.22,669.84 229.22,661.37 234.5,661.37 234.5,658.28 229.22,658.28 229.22,638.47 229.46,636.7 230.18,635.38 231.35,634.55 232.98,634.26 234.5,634.48 234.5,631.34 233.16,630.96 231.52,630.84 228.57,631.33
no net on Top Overlay "AntmicroLogo" (solid, pour order 10): 284.62,631.12 289.56,631.12 289.56,661.37 284.62,661.37
no net on Top Overlay "AntmicroLogo" (solid, pour order 8): 243.98,631.07 ccw(c243.98,631.12) 244.03,631.12 244.03,657.74 246.59,658.51 249.65,658.74 251.21,658.64 252.53,658.33 253.62,657.84 254.5,657.17 255.17,656.34 255.63,655.36 255.91,654.24 256,653 256,631.12 ccw(c256.05,631.12) 256.05,631.07 260.93,631.07 ccw(c260.93,631.12) 260.98,631.12 260.98,655.9 262.15,657.07 263.52,657.97 265.08,658.54 266.82,658.74 268.36,658.63 269.65,658.28 270.72,657.72 271.57,656.97 272.21,656.03 272.66,654.91 272.92,653.64 273.01,652.22 273.01,652.21 273.01,652.22 273.01,631.12 ccw(c273.05,631.12) 273.05,631.07 277.94,631.07 ccw(c277.94,631.12) 277.98,631.12 277.98,652.16 ccw(c277.94,652.16) 277.98,652.17 277.36,656.13 ccw(c277.31,656.13) 277.35,656.15 ccw(c277.31,656.13) 277.35,656.15 275.42,659.24 ccw(c275.38,659.21) 275.42,659.24 ccw(c275.38,659.21) 275.41,659.25 ccw(c275.38,659.21) 275.41,659.25 272.09,661.25 cw(c272.07,661.21) 272.09,661.25 ccw(c272.07,661.21) 272.07,661.26 267.28,661.97 ccw(c267.27,661.93) 267.27,661.97 ccw(c267.27,661.93) 267.27,661.97 264.68,661.73 cw(c264.68,661.68) 264.68,661.73 ccw(c264.68,661.68) 264.67,661.73 262.32,661.03 ccw(c262.33,660.98) 262.31,661.02 260.26,659.91 ccw(c260.28,659.87) 260.25,659.9 ccw(c260.28,659.87) 260.25,659.9 258.58,658.46 256.99,659.95 cw(c256.96,659.92) 256.99,659.95 ccw(c256.96,659.92) 256.98,659.96 ccw(c256.96,659.92) 256.98,659.96 cw(c256.96,659.92) 256.99,659.95 256.98,659.96 255.02,661.06 ccw(c254.99,661.02) 255.02,661.06 ccw(c254.99,661.02) 255.01,661.07 252.55,661.74 ccw(c252.54,661.7) 252.55,661.74 ccw(c252.54,661.7) 252.55,661.74 249.48,661.97 cw(c249.48,661.93) 249.48,661.97 ccw(c249.48,661.93) 249.48,661.97 243.84,661.39 ccw(c243.85,661.35) 243.83,661.39 239.08,659.84 ccw(c239.1,659.8) 239.05,659.8 239.05,631.12 ccw(c239.1,631.12) 239.1,631.07 243.98,631.07 cw(c-190.99,813.99)
no net on Top Overlay "AntmicroLogo" (solid, pour order 4): 200.43,631.12 200.43,657.78 202.9,658.54 205.76,658.79 208.9,658.37 211.01,657.1 212.18,654.97 212.55,652 212.55,631.12 217.49,631.12 217.49,652 216.8,656.25 214.68,659.36 211.02,661.28 205.76,661.93 200.27,661.35 195.49,659.8 195.49,631.12
no net on Top Overlay "AntmicroLogo" (solid, pour order 18): 205 vertices, not listed, extent -348.32,619.36 125.06,827.76
no net on Top Overlay "AntmicroLogo" (solid, pour order 34): 319 vertices, not listed, extent 49.55,581.97 160.15,708.64
1V8 on Power "Solder Side-No Net" (solid, pour order 18): -282,613 -30,613 -30,754 -29,753 277,753 277,598 278,597 321,597 321,18 182,18 182,124 183,125 -118,125 -118,42 -118,26 -282,26
3V3 on Power "Solder Side-No Net" (solid, pour order 23): 258,6 171,6 171,104 170,105 168,107 -86,107 -86,14 -88,12 -310,12 -310,649 -311,650 -382.58,650 -382.58,-27.58 -383,-28 -382,-29 258,-29
3V3_M on Power "Solder Side-No Net" (solid, pour order 25): 399,422 336,422 336,173 336,10 337,9 336,8 268,8 268,-45 269.79,-43.21 397.54,-43.21
GND on Component Side "Solder Side-No Net" (solid, pour order 20): -397.54,751.87 394.83,751.87 395.62,752.67 397.54,750.75 397.54,-43.21 -396.41,-43.21 -398.33,-41.29
GND on Ground Plane (split plane): 378.62,-24.29 54.45,-24.29 54.45,0 54.43,0.26 54.1,6.1 53.08,12.11 51.39,17.98 49.05,23.62 46.1,28.96 42.56,33.94 38.5,38.5 33.94,42.56 28.96,46.1 23.62,49.05 17.98,51.39 12.11,53.08 6.1,54.1 0,54.44 -6.1,54.1 -12.11,53.08 -17.98,51.39 -23.62,49.05 -28.96,46.1 -33.94,42.56 -38.5,38.5 -42.56,33.94 -46.1,28.96 -49.05,23.62 -51.39,17.98 -53.08,12.11 -54.1,6.1 -54.42,0.42 -54.45,0.11 -54.45,0.07 -54.45,0.03 -54.45,0 -55.7,0 -55.61,-0.21 -54.45,-0.2 -54.45,-24.29 -378.62,-24.29 -378.62,732.95 378.62,732.95

## Keep-outs
Keep-Out Layer:
  lines w3.94: 39,-39.37 40,-39.37
  lines w10: 39.37,-39.37 39.37,0 ccw(c0,0) -39.37,0 -39.37,-39.37 -393.7,-39.37 -393.7,748.03 393.7,748.03 393.7,-39.37 40,-39.37

## Other copper
Component Side:
  rectangle net GND: -242,112 -162,181
  region net 3V3: 222,19 222,-28 132,-28 132,31 170,31 170,19
  region net 1V8: 340,59 340,15 294,15 294,-6 252,-6 252,20 273,20 273,80 252,80 252,107 297,107 297,59
Solder Side:
  region net 3V3: -221,553 -221,479 -382,479 -382,553
  region net 3V3_M: -348,391 -348,371 -332,371 -292,331 -292,294 -185,294 -185,324 -264,324 -331,391

## Silkscreen, mask and mechanical layers (free items; w line width, h text height)
Top Overlay:
  drawing of 2910 lines, arcs and shapes, not listed
Bottom Overlay:
  lines w0: -395,518 -366,518 ; -233,764 -200,740 ; -191,361 -6,407 ; -186,316 -106,432 ; -129,338 6,404 ; -95,235 -59,199 ; -84,19 -84,117 ; -36,345 3,345 ; 5,248 47,272 ; 146,382 157,371 ; 148,735 148,750 ; 239,734 298,785 ; 292,733 406,753 ; 333,685 394,643 ; 339,452 421,452 ; 363,512 419,512
  text "JTAG TDI" at 442,795 h30
  text "GPIO17" at -206,776 h30
  text "AON_RST_EN" at 196,755 h30
  text "JTAG TDO" at 652,741 h30
  text "GPIO16" at 22,689 h30
  text "JTAG TCK" at 639,624 h30
  text "JTAG TMS" at 657,506 h30
  text "3V3" at -401,504 h30
  text "3V3_M" at 45,450 h30
  text "1V8" at 91,393 h30
Bottom Solder:
  circle w19.68: c-132,308 r9.84
  text "Rev.0.2" at -148,32 h30 r270
Mechanical 2:
  drawing of 347 lines, arcs and shapes, not listed
  text "Layer" at 877,1548 h60
  text "Name" at 1286.91,1548 h60
  text "Material" at 2226.65,1548 h60
  text "Thickness" at 3086.42,1548 h60
  text "Constant" at 3736.26,1548 h60
  text "Board Layer Stack" at 4306.12,1548 h60
  text "1" at 877,1428 h60
  text "Top Paste" at 1286.91,1428 h60
  text "2" at 877,1308 h60
  text "Top Overlay" at 1286.91,1308 h60
  text "3" at 877,1188 h60
  text "Top Solder" at 1286.91,1188 h60
  text "Solder Resist" at 2226.65,1188 h60
  text "0.010mm" at 3086.42,1188 h60
  text "3.5" at 3736.26,1188 h60
  text "4" at 877,1068 h60
  text "Component Side" at 1286.91,1068 h60
  text "Copper" at 2226.65,1068 h60
  text "0.036mm" at 3086.42,1068 h60
  text "5" at 877,948 h60
  text "Dielectric 1" at 1286.91,948 h60
  text "FR-4" at 2226.65,948 h60
  text "0.300mm" at 3086.42,948 h60
  text "4.8" at 3736.26,948 h60
  text "6" at 877,828 h60
  text "Power" at 1286.91,828 h60
  text "Copper" at 2226.65,828 h60
  text "0.018mm" at 3086.42,828 h60
  text "7" at 877,708 h60
  text "Dielectric 4" at 1286.91,708 h60
  text "0.360mm" at 3086.42,708 h60
  text "4.2" at 3736.26,708 h60
  text "8" at 877,588 h60
  text "Ground Plane" at 1286.91,588 h60
  text "Copper" at 2226.65,588 h60
  text "0.018mm" at 3086.42,588 h60
  text "9" at 877,468 h60
  text "Dielectric 3" at 1286.91,468 h60
  text "0.300mm" at 3086.42,468 h60
  text "4.2" at 3736.26,468 h60
  text "10" at 877,348 h60
  text "Solder Side" at 1286.91,348 h60
  text "Copper" at 2226.65,348 h60
  text "0.036mm" at 3086.42,348 h60
  text "11" at 877,228 h60
  text "Bottom Solder" at 1286.91,228 h60
  text "Solder Resist" at 2226.65,228 h60
  text "0.010mm" at 3086.42,228 h60
  text "3.5" at 3736.26,228 h60
  text "12" at 877,108 h60
  text "Bottom Overlay" at 1286.91,108 h60
  text "13" at 877,-12 h60
  text "Bottom Paste" at 1286.91,-12 h60

## Text inside footprints (layer, text, board x,y; h text height)
J1: Bottom Overlay "1" at -306.12,505.03 h30